# Altium PCB 0-PCB2_1.PcbDoc
Units mil, origin at the board's own origin, x right, y up, seen from the top; angles counter-clockwise.
Board outline 1640.12 x 1640.12 mil, 2 copper layers (Top Layer, Bottom Layer); 32 components, 33 nets, 260 pads, 84 vias.
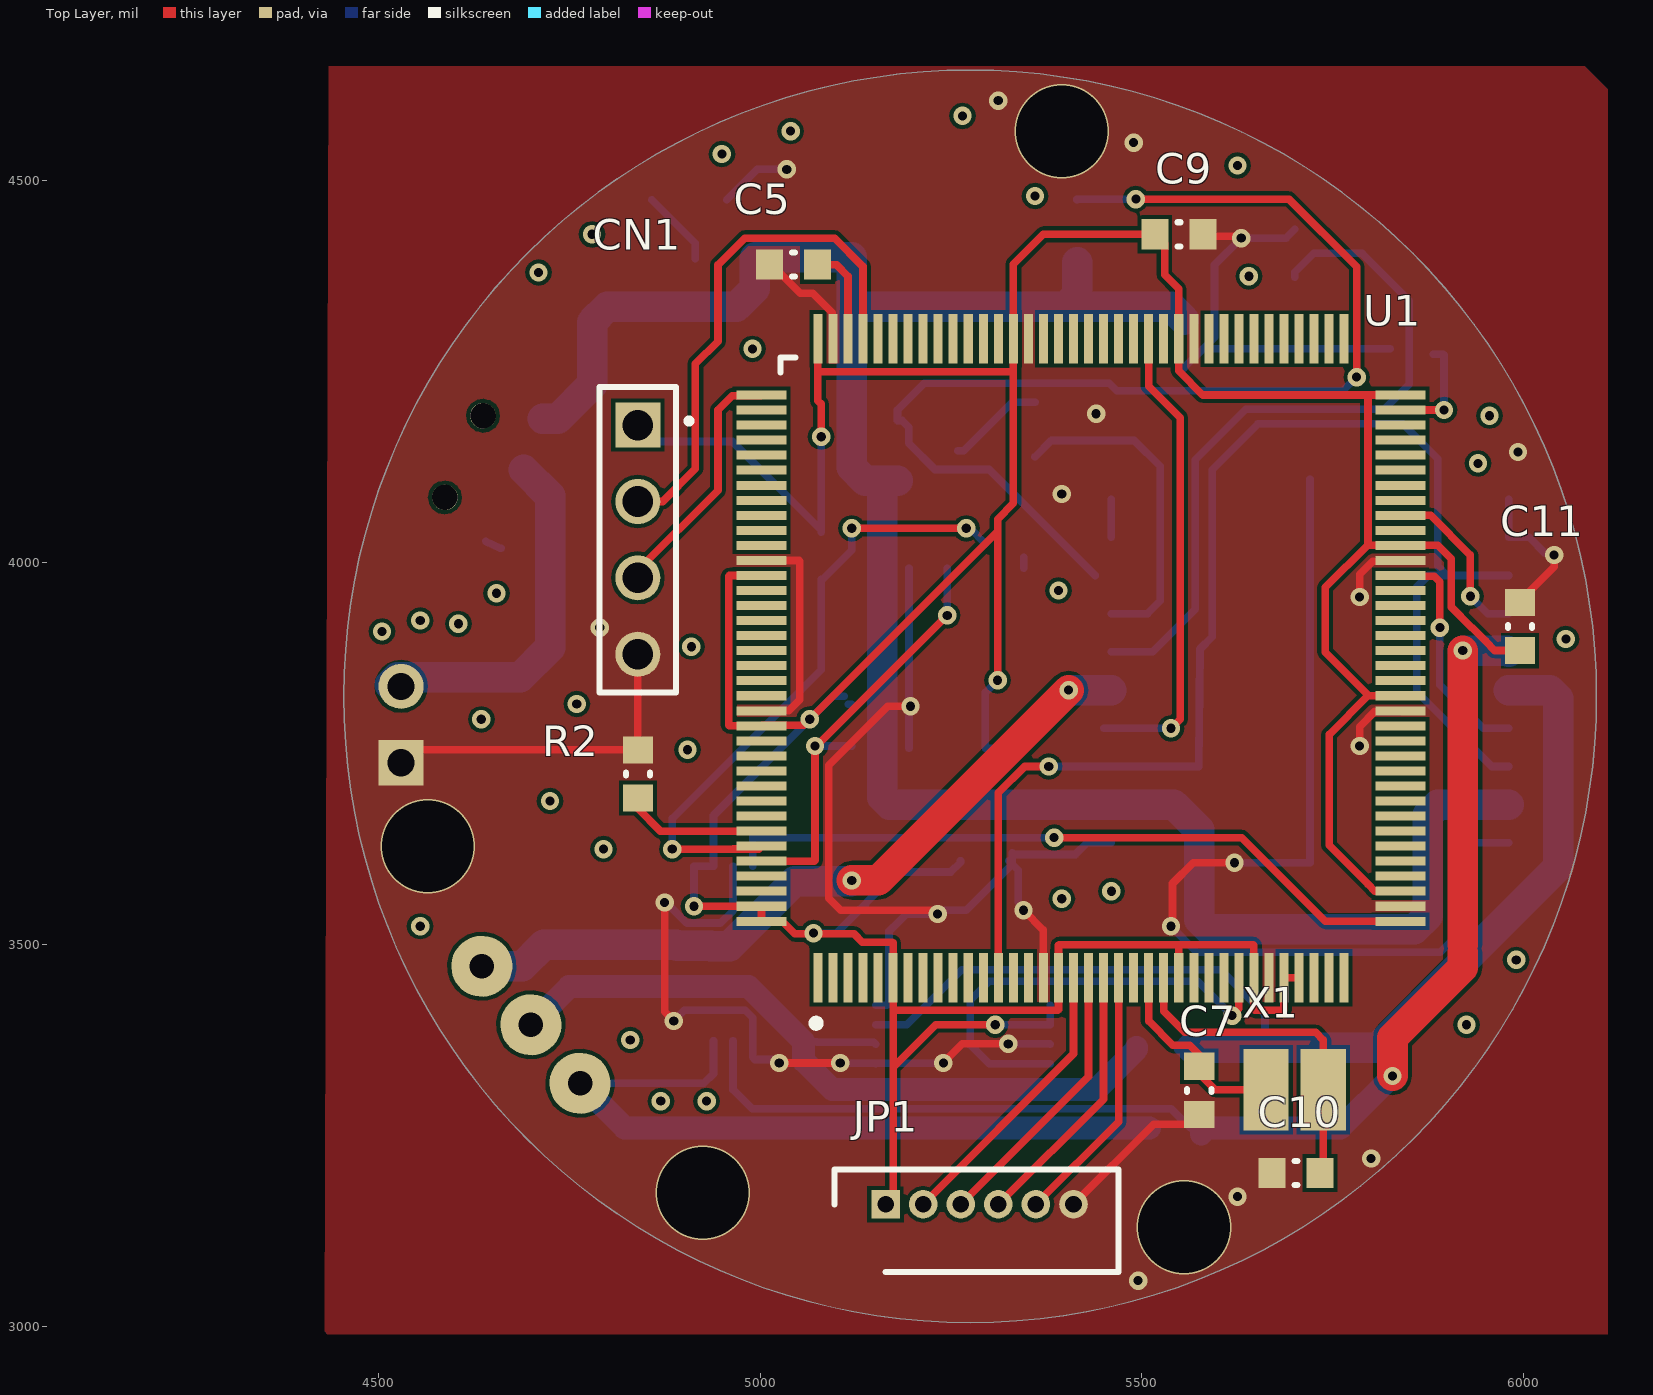
[diagram p0: Top Layer view]
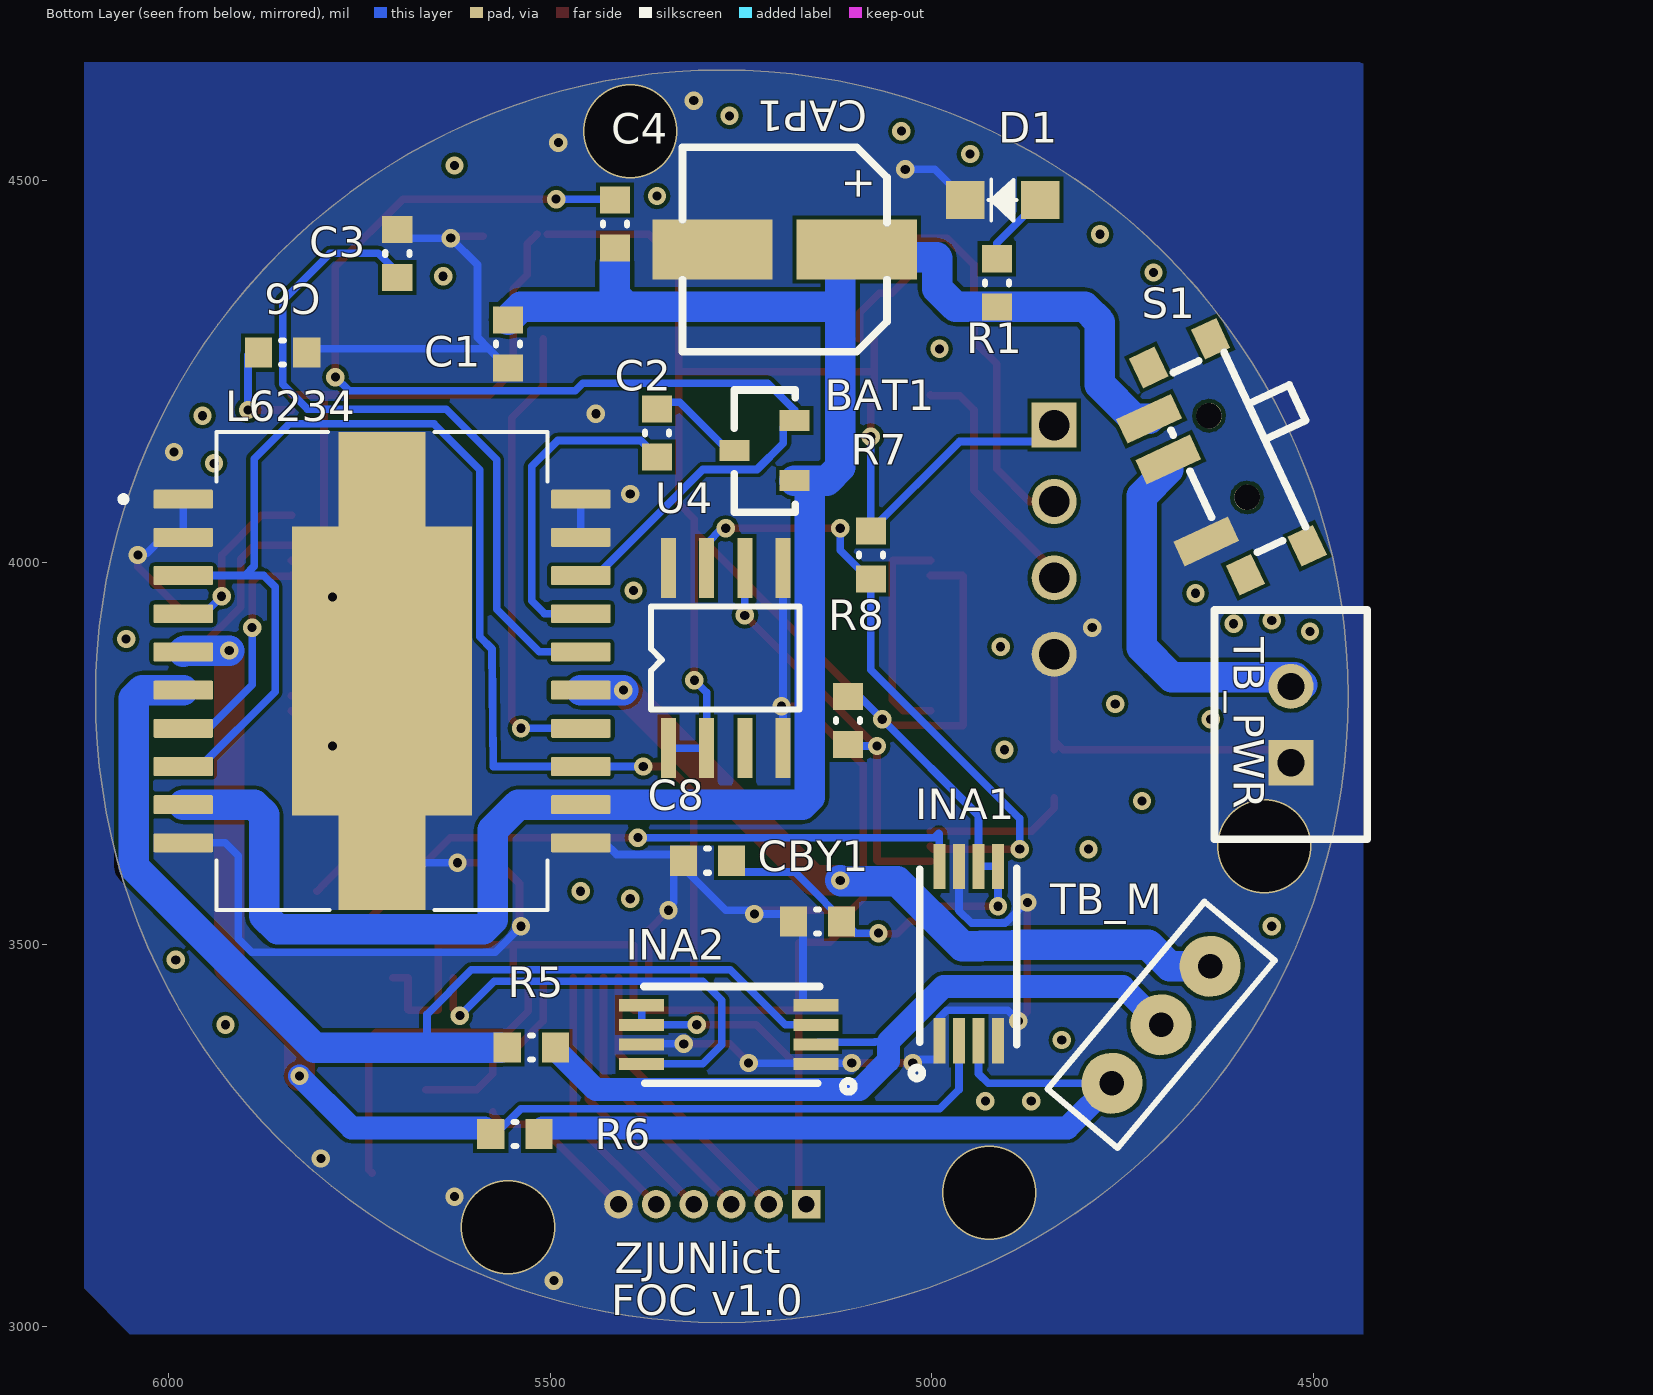
[diagram p1: Bottom Layer view, seen from below]

## Layer stack, top to bottom
Top Solder: solder mask 0.4, Solder Resist, Dk 3.5
Top Layer: signal copper 1.4
Dielectric 1: dielectric 12.6, FR-4, Dk 4.8
Bottom Layer: signal copper 1.4
Bottom Solder: solder mask 0.4, Solder Resist, Dk 3.5

## Board outline
4454.94,3825 ccw(c5275,3825) 5275,3004.94 ccw(c5275,3825) 6095.06,3825 ccw(c5275,3825) 5275,4645.06 ccw(c5275,3825)

## Design rules (kind name [scope] priority, off if disabled: settings)
Clearance [All] p1: gap=5 ignorepadtopadclearanceinfootprint=FALSE
HoleSize [All] p1: absolutevalues=TRUE maxlimit=150 minlimit=1 maxpercent=80.000 minpercent=20.000
HoleToHoleClearance [All] p1: gap=5 allowstackedmicrovias=TRUE
MinimumSolderMaskSliver [All] p1: minsoldermaskwidth=0
PlaneConnect [All] p1: planeconnectstyle=Direct reliefexpansion=20 reliefentries=4 reliefconductorwidth=10 reliefairgap=10
PolygonConnect [All] p1: connectstyle=Direct reliefconductorwidth=10 reliefentries=4 polygonreliefangle="90 Angle" airgapwidth=10
RoutingVias [All] p1: holewidth=12 width=24 viastyle="Through Hole" minholewidth=12 minwidth=24 maxholewidth=12 maxwidth=24
SilkToSilkClearance [All] p1: silktosilkclearance=5
SilkToSolderMaskClearance [IsPad] p1: minsilkscreentomaskgap=0 clearancetoexposedcopper=TRUE
SolderMaskExpansion [All] p1: expansion=3 useseparateexpansions=TRUE expansionbottom=3
Width [All] p1: maxlimit=40 minlimit=6 preferedwidth=10 minimp=50.000000 maximp=50.000000 favimp=50.000000
24 further rules are at their usual default settings.

## Components (designator, comment, footprint, x,y, rotation, side; value= is the part's Value field where it differs from the comment)
BAT1 "BAT54S" BAT54s 5258.74,4186.13 r180 bottom
C1 "100nF" 0603C 5555,4286.5 r270 bottom
C2 "10nF" 0603C 5360,4170 r270 bottom
C3 "1μF" 0603C 5700,4405 r90 bottom
C4 "220nF" 0603C 5415,4443.5 r90 bottom
C5 "1μF" 0603C 5043.72,4390.2 r180 top
C6 "1μF" 0603C 5850,4275 r180 bottom
C7 "4.3pF" 0603C 5575,3309.22 r270 top
C8 "100nF" 0603C 5294,3609.8 r0 bottom
C9 "1μF" 0603C 5548.5,4430 r0 top
C10 "4.3pF" 0603C 5701.63,3201.01 r180 top
C11 "100nF" 0603C 5995,3916.34 r90 top
CAP1 "EEH-ZA1E101XP" EEH-ZA1E101XP 5326.62,4276.14 r180 bottom
CBY1 "0.1μF" 0603C 5150,3530 r0 bottom
CN1 "SWD" HDR_1x4_2R54_V_M 4840,4180.12 r270 top
D1 "LED" D0805+ 4858.27,4475 r0 bottom
INA1 "INA240A1" INA240 4951.79,3488.32 r180 bottom
INA2 "INA240A2" INA240 5265.83,3382.2 r90 bottom
JP1 "SPI1" SHDR6 5164.3,3160 r0 top
L6234 "L6234PD013TR" SOIC127P1420X360-21N 5720,3858.17 r180 bottom
R1 "2K" 0603R 4915,4366.5 r90 bottom
R2 "10K" 0603R 4840,3723.5 r90 top
R5 "10mOhm" 0603R 5524.5,3365 r180 bottom
R6 "10mOhm" 0603R 5546.16,3252.2 r180 bottom value=1K
R7 "4.7KOhm" 0603R 5080,4010 r90 bottom
R8 "4.7kOhm" 0603R 5110,3793.5 r90 bottom
S1 "" SW-SMD_G-SWITCH_MK-12C02-G015 4610,4140 r65 bottom
TB_M "TB002-500-03BE" 10.7MHZ 4635.72,3471.6 r310 bottom
TB_PWR "TB002-500-02BE" 1*2_2.5mm 4530,3738.09 r180 bottom
U1 "MCU_LQFP144" LQFP144_0R5_SKT 5420.2,3875 r0 top
U4 "AS5600" "SOIC 8" 5270,3875 r90 bottom
X1 "NX3225GD-8M" OSC_2SM_3R2x2R5 5700.01,3310 r180 top

## Footprints (in the part's own frame and the unit in brackets; to place one, negate y for a bottom-side part, rotate by r counter-clockwise, add the part's x,y. Pads: shape width x height; smd on the part's side, far side on the other; paste and mask are expansions set on the pad)
1*2_2.5mm [mm]
  rect 1.5x1.5 hole 0.9: 1(0,0)
  round 1.5 hole 0.9: 2(0,2.54)
  silkscreen extent -2.54,-2.54 2.54,5.08
10.7MHZ [mil]
  round 80 hole 32: 1(0,0) 2(200,0) 3(100,0)
  silkscreen extent -60,-60 260,60
0603C [mm] "Chip Capacitor, Body 1.6x0.8mm, Height 1.0mm, IPC Medium Density"
  rect 0.9x1 smd: 1(-0.8,0) 2(0.8,0)
  silkscreen extent -0.05,-0.4 0.05,0.4, body extent -0.87,-0.48 0.88,0.47, height 1
0603R [mm] "Chip Resistor, Body 1.6x0.8mm, IPC Medium Density"
  rect 0.9x1 smd: 1(-0.8,0) 2(0.8,0)
  silkscreen extent -0.05,-0.4 0.05,0.4, body extent -0.85,-0.47 0.85,0.47, height 0.6
BAT54s [mm]
  rect 1x0.7 smd: 1(2,-2) 2(2,0) 3(0,-1)
  silkscreen extent 0,-3.05 2.03,1.02, body extent -0.46,-2.48 2.46,0.44, height 1
D0805+ [mil]
  rect 50x50 smd: A(0,0) K(98,0)
  silkscreen extent 31,-27 68,27
EEH-ZA1E101XP [mm]
  rect 4x2 smd: 1(1,3.4) 2(5.8,3.4)
  silkscreen extent 0,0 6.8,6.8, body extent -0.3,0.2 7,6.8, height 7.7
HDR_1x4_2R54_V_M [mm] "Male Header, Pitch 2.54mm, 4x1 Position, Mated Height 6mm, Tail Length 3mm"
  rect 1.5x1.5 hole 1.02: 1(0,0)
  round 1.5 hole 1.02: 2(2.54,0) 3(5.08,0) 4(7.62,0)
  silkscreen extent -1.27,-1.27 8.89,1.76, body extent -1.27,-1.27 8.89,1.27, height 9
INA240 [mm]
  rect 0.4x1.5 smd mask+0.05: 1(-0.975,-2.9) 2(-0.325,-2.9) 3(0.325,-2.9) 4(0.975,-2.9) 5(0.975,2.9) 6(0.325,2.9) 7(-0.325,2.9) 8(-0.975,2.9)
  silkscreen extent -1.91,-4.16 1.6,2.83, body extent -1.5,-3.3 1.5,3.3, height 1.2
LQFP144_0R5_SKT [mm] "32-bit MCU ARM-based Cortex-M3 20 X 20mm, 0.5mm Pitch, 1.6mm Max thickness"
  rect 0.3x1.65 smd: 1(-8.75,-10.625) 2(-8.25,-10.625) 3(-7.75,-10.625) 4(-7.25,-10.625) 5(-6.75,-10.625) 6(-6.25,-10.625) 7(-5.75,-10.625) 8(-5.25,-10.625) 9(-4.75,-10.625) 10(-4.25,-10.625) 11(-3.75,-10.625) 12(-3.25,-10.625) 13(-2.75,-10.625) 14(-2.25,-10.625) 15(-1.75,-10.625) 16(-1.25,-10.625) 17(-0.75,-10.625) 18(-0.25,-10.625) 19(0.25,-10.625) 20(0.75,-10.625) 21(1.25,-10.625) 22(1.75,-10.625) 23(2.25,-10.625) 24(2.75,-10.625) 25(3.25,-10.625) 26(3.75,-10.625) 27(4.25,-10.625) 28(4.75,-10.625) 29(5.25,-10.625) 30(5.75,-10.625) 31(6.25,-10.625) 32(6.75,-10.625) 33(7.25,-10.625) 34(7.75,-10.625) 35(8.25,-10.625) 36(8.75,-10.625) 73(8.75,10.625) 74(8.25,10.625) 75(7.75,10.625) 76(7.25,10.625) 77(6.75,10.625) 78(6.25,10.625) 79(5.75,10.625) 80(5.25,10.625) 81(4.75,10.625) 82(4.25,10.625) 83(3.75,10.625) 84(3.25,10.625) 85(2.75,10.625) 86(2.25,10.625) 87(1.75,10.625) 88(1.25,10.625) 89(0.75,10.625) 90(0.25,10.625) 91(-0.25,10.625) 92(-0.75,10.625) 93(-1.25,10.625) 94(-1.75,10.625) 95(-2.25,10.625) 96(-2.75,10.625) 97(-3.25,10.625) 98(-3.75,10.625) 99(-4.25,10.625) 100(-4.75,10.625) 101(-5.25,10.625) 102(-5.75,10.625) 103(-6.25,10.625) 104(-6.75,10.625) 105(-7.25,10.625) 106(-7.75,10.625) 107(-8.25,10.625) 108(-8.75,10.625)
  rect 1.65x0.3 smd: 37(10.625,-8.75) 38(10.625,-8.25) 39(10.625,-7.75) 40(10.625,-7.25) 41(10.625,-6.75) 42(10.625,-6.25) 43(10.625,-5.75) 44(10.625,-5.25) 45(10.625,-4.75) 46(10.625,-4.25) 47(10.625,-3.75) 48(10.625,-3.25) 49(10.625,-2.75) 50(10.625,-2.25) 51(10.625,-1.75) 52(10.625,-1.25) 53(10.625,-0.75) 54(10.625,-0.25) 55(10.625,0.25) 56(10.625,0.75) 57(10.625,1.25) 58(10.625,1.75) 59(10.625,2.25) 60(10.625,2.75) 61(10.625,3.25) 62(10.625,3.75) 63(10.625,4.25) 64(10.625,4.75) 65(10.625,5.25) 66(10.625,5.75) 67(10.625,6.25) 68(10.625,6.75) 69(10.625,7.25) 70(10.625,7.75) 71(10.625,8.25) 72(10.625,8.75) 109(-10.625,8.75) 110(-10.625,8.25) 111(-10.625,7.75) 112(-10.625,7.25) 113(-10.625,6.75) 114(-10.625,6.25) 115(-10.625,5.75) 116(-10.625,5.25) 117(-10.625,4.75) 118(-10.625,4.25) 119(-10.625,3.75) 120(-10.625,3.25) 121(-10.625,2.75) 122(-10.625,2.25) 123(-10.625,1.75) 124(-10.625,1.25) 125(-10.625,0.75) 126(-10.625,0.25) 127(-10.625,-0.25) 128(-10.625,-0.75) 129(-10.625,-1.25) 130(-10.625,-1.75) 131(-10.625,-2.25) 132(-10.625,-2.75) 133(-10.625,-3.25) 134(-10.625,-3.75) 135(-10.625,-4.25) 136(-10.625,-4.75) 137(-10.625,-5.25) 138(-10.625,-5.75) 139(-10.625,-6.25) 140(-10.625,-6.75) 141(-10.625,-7.25) 142(-10.625,-7.75) 143(-10.625,-8.25) 144(-10.625,-8.75)
  silkscreen extent -10,-12.27 -8.69,10
OSC_2SM_3R2x2R5 [mm] "Crystal 8M Hz 3.2x2.5mm SMD"
  rect 1.5x2.7 smd: 1(-0.95,0) 2(0.95,0)
  body extent -1.6,-1.25 1.6,1.25, height 1
SHDR6 [mm]
  rect 0.95x0.95 hole 0.55: 1(0,0)
  round 0.95 hole 0.55: 2(1.25,0) 3(2.5,0) 4(3.75,0) 5(5,0) 6(6.25,0)
  silkscreen extent -1.7,-2.25 7.75,1.15
SOIC127P1420X360-21N [mm]
  rrect16% 1.99x0.63 smd: 1(-6.61,5.715) 2(-6.61,4.445) 3(-6.61,3.175) 4(-6.61,1.905) 5(-6.61,0.635) 6(-6.61,-0.635) 7(-6.61,-1.905) 8(-6.61,-3.175) 9(-6.61,-4.445) 10(-6.61,-5.715) 11(6.61,-5.715) 12(6.61,-4.445) 13(6.61,-3.175) 14(6.61,-1.905) 15(6.61,-0.635) 16(6.61,0.635) 17(6.61,1.905) 18(6.61,3.175) 19(6.61,4.445) 20(6.61,5.715)
  rect 6x9.6 smd paste-6: 21(0,0)
  rect 2.9x3.15 smd paste-3: 22(0,6.375) 23(0,-6.375)
  silkscreen extent -8.7,-7.95 5.5,7.95
"SOIC 8" [mm]
  rect 2x0.5 smd: 1(-2.993,1.905) 2(-2.993,0.635) 3(-2.993,-0.635) 4(-2.993,-1.905) 5(2.993,-1.905) 6(2.993,-0.635) 7(2.993,0.635) 8(2.993,1.905)
  silkscreen extent -1.71,-2.45 1.72,2.48
SW-SMD_G-SWITCH_MK-12C02-G015 [mm]
  rect 0.9x2 smd: 1(-2.25,1.912) 2(0.75,1.912) 3(2.25,1.912)
  rect 1.1x0.93 smd: 4(3.8,1.2) 5(3.8,-1.07) 6(-3.8,-1.07) 7(-3.8,1.2)
  round 0.85 hole 0.85 unplated: ""(-1.5,0.065) ""(1.5,0.065)
  silkscreen extent -3.3,-2.78 3.3,1.42

## Part data
BAT1: Supplier Part Number 1=512-BAT54S, Supplier 1=Mouser
C1 C2 C3 C4 C5 C6 C11 CBY1: library part CAP_1
C7 C8 C9 C10: library part CAP, "Capacitor"
CAP1: Supplier Part Number 1=667-EEH-ZA1E101XP, Supplier 1=Mouser
CN1: library part "Header 4", "Header, 4-Pin, Single row", Publisher="Altium Limited", Revision="17-Jul-2002: Re-released for DXP Platform."
INA1 INA2: library part INA240, Supplier Part Number 1=595-INA240A2PWR, Supplier 1=Mouser
JP1: library part "HEADER 6"
L6234: "Motor Driver BiCDMOS Parallel PowerSO-20", Package="SO-20 STMicroelectronics", Digi-Key_Part_Number=497-5352-1-ND, Digi-Key_Purchase_URL=https://www.digikey.com/product-detail/en/stmicroelectronics/L6234PD013TR/497-5352-1-ND/1154483?utm_source=snapeda&utm_medium=aggregator&utm_campaign=symbol, MF=STMicroelectronics, MP=L6234PD013TR, SnapEDA_Link=https://www.snapeda.com/parts/L6234PD013TR/STMicroelectronics/view-part/75337/?ref=snap
R1 R2: library part RES1
R5 R7 R8: library part RES2
R6: library part Res1, "Resistor", Ordered by=Subcon, Published=8-Jun-2000, Publisher="Altium Limited", Revision="July-2002: Re-released for DXP Platform."
S1: library part MK-12C02-G015
TB_M: Supplier Part Number 1=490-TB002-500-03BE, Supplier 1=Mouser
TB_PWR: Supplier Part Number 1=490-TB002-500-02BE, Supplier 1=Mouser
X1: library part XTAL, "Crystal Oscillator", LatestRevisionDate=17-Jul-2002, LatestRevisionNote="Re-released for DXP Platform.", PackageReference=R38, Published=8-Jun-2000, Publisher="Altium Limited"

## Via types
v1: diameter 24, hole 12, Top Layer to Bottom Layer, 80 vias
v2: diameter 124, hole 120, Top Layer to Bottom Layer, 4 vias

## Nets (pads, with @x,y where several pads share a name; then routed paths per layer and width w, separated by ;. In a path a pad name is that pad's centre, name@x,y a point inside that pad or via, vN(x,y) a via of type N, cw(c..) or ccw(c..) an arc to the next point about the centre after c; other vN are vias at no path point)
+3.3: C8.1 C9.1 C11.1 CBY1.1 CN1.1 INA1.5 INA1.6 INA2.5 INA2.6 JP1.1 R7.2 R8.2 U1.6 U1.17 U1.25 U1.30 U1.32 U1.33 U1.39 U1.52 U1.62 U1.72 U1.84 U1.95 U1.108 U1.121 U1.131 U1.143 U1.144 U4.1 U4.2 | length 6250.8
  Top Layer w10: CN1.1@4841.41,4188.07 CN1.1@4844.68,4191.34 ; v1(4913.4,3550.2) U1.143 U1.144 5029,3530.51 5045.51,3514 5123,3514 5134,3503 5173.14,3503 5174.14,3502 U1.6 5174.14,3415 ; U1.121 4960,3983.27 4959,3982.27 4959,3787.42 4960,3786.42 U1.131 5002.8,3787.32 5057.32,3787.32 v1(5065,3795) 5311,4041 ; U1.108 5075.71,4251 ; v1(5080,4165) 5080,4207.75 5075.71,4212.04 5075.71,4251 ; JP1.1 5174.14,3169.84 5174.14,3339.14 ; v1(5308,3395) 5230,3395 5174.14,3339.14 ; v1(5311,3846) 5311,4041 ; C9.1@5503.5,4430 5370.99,4430 5331.62,4390.63 U1.95 5331.62,4251 ; C9.1 5529.72,4417.28 5529.72,4376.81 5548.16,4358.38 U1.84 5548.16,4251.16 5579.82,4219.49 5797,4219.49 ; U1.25 5548.16,3499 ; U1.33 U1.32 5685.95,3415 5684.95,3414 5647.58,3414 5646.58,3415 U1.30 5646.58,3499 5645.58,3500 5549.16,3500 5548.16,3499 ; 5797,3825.79 U1.52 ; 5797,4022.64 U1.62 5887.36,4022.64 5905,4005 5905,3942 5932,3915 5932.43,3915 5950,3897.43 5950,3897 5962,3885 C11.1@5980,3885 ; 5805.06,3569.94 5796,3579 5745,3630 5745,3775 5796.39,3826.39 5740,3882.79 5740,3967.64 5796,4023.64 5796,4218.49 5797,4219.49 ; U1.72 5797,4219.49 ; 5075.71,4251 5076.71,4250 5330.62,4250 5331.62,4251 ; 5174.14,3339.14 5174.14,3415 ; 5174.14,3415 5175.14,3414 5389.68,3414 5390.68,3415 U1.17 5390.68,3499 5391.68,3500 5547.16,3500 5548.16,3499 ; 5311,4041 5311,4057.02 5331.62,4077.64 5331.62,4251
  Bottom Layer w10: CN1.1@4839.68,4181.22 4840.39,4180.51 4854.2,4166.69 4862.24,4158.66 4963.84,4158.66 R7.2@5080,4042.5 ; v1(4913.4,3550.2) INA1.5 INA1.6 4938.99,3668.99 v1(5065,3795) 5095,3825 R8.2 ; v1(5070,3515) 5099.5,3515 5179.62,3595.12 5249.78,3595.12 5262.5,3607.84 C8.1 ; R7.2@5080,4040 R7.2 R7.2@5080,4042.5 ; v1(5080,4165) R7.2@5080,4042.5 ; R8.2@5115.44,3814.56 R8.2@5120,3814.56 ; v1(5308,3395) INA2.6 INA2.5 ; v1(5311,3846) 5295,3830 U4.2 U4.1
GND: C1.2 C3.2 C5.2 C6.2 C7.2 C8.2 C9.2 C10.2 C11.2 CAP1.1 CBY1.2 CN1.4 D1.K INA1.1 INA1.4 INA1.7 INA2.1 INA2.4 INA2.7 JP1.6 L6234.1 L6234.2 L6234.10 L6234.11 L6234.19 L6234.20 L6234.21 L6234.22 L6234.23 R2.2 S1.1 TB_PWR.1 U1.16 U1.31 U1.38 U1.51 U1.61 U1.83 U1.94 U1.107 U1.120 U1.130 U4.4 U4.5 U4.8 | length 5796.9
  Top Layer w10: TB_PWR.1 4546.91,3755 4828.27,3755 R2.2@4840,3766.73 ; R2.2 R2.2@4840,3766.73 ; CN1.4 R2.2@4840,3766.73 ; v1(4875,3555) 4875,3412 v1(4887,3400) ; U1.130 5037.5,3806.1 5052,3820.6 5052,4001.95 5051,4002.95 U1.120 ; C5.2@5017.01,4390 5017.01,4388.03 5052.42,4352.62 5068.93,4352.62 5094.49,4327.06 5094.49,4294.21 U1.107 ; v1(5025,3345) v1(5105,3345) v1@5105,3346.21 ; v1(5197,3812) 5167,3812 5090,3735 5090,3560.5 5105.5,3545 v1@5231,3545 ; v1(5240,3345) 5265,3370 v1(5325,3370) ; v1(5345,3545) 5370.99,3519.01 U1.16 ; JP1.6 5515.37,3265.01 5562.28,3265.01 C7.2 C7.2@5575,3281.15 ; v1(5538,3524) 5540,3526 5540,3580 5567.19,3607.19 v1(5621.19,3607.19) ; C9.2@5587.5,4427.5 5627.5,4427.5 v1(5630,4425) ; v1(5785,3760) 5785,3785.44 5804.76,3805.2 5837.6,3805.2 U1.51 ; v1(5785,3955) 5785,3985 5802.05,4002.05 5837.6,4002.05 U1.61 ; C11.2@5980,3935 6039.64,3994.64 v1(6039.64,4010)
  Bottom Layer w10: S1.1 4660.4,4018.76 S1.1@4661,4018.76 ; v1(4875,3555) 4877.49,3555 4904.29,3528.2 4947.8,3528.2 4948,3528 4964.58,3544.58 INA1.7 ; v1(4887,3400) 4901,3414 4980.43,3414 4990.18,3404.25 INA1.1 4990.18,3352.49 4993.05,3349.62 5016.59,3349.62 5021.21,3345 v1(5025,3345) ; D1.K 4996.27,4515 v1(5035,4515) ; v1(5105,3345) 5105.59,3344.41 5151.06,3344.41 INA2.1 5152.24,3344.41 5239.41,3344.41 v1(5240,3345) ; INA2.4 5165.91,3420.59 5168.78,3423.46 5168.78,3517.28 CBY1.2 5191.5,3540 v1(5232.5,3540) ; U4.4 v1@5195,3810 ; U4.5 v1@5195,3810 ; v1(5197,3812) v1@5195,3810 ; v1@5231,3545 5270,3545 5330,3605 C8.2@5330,3605.3 ; v1(5325,3370) 5379.41,3370 INA2.7 ; C8.2 C8.2@5330,3605.3 ; v1(5345,3545) 5345,3548.79 5338.21,3555.58 5338.21,3597.09 C8.2@5330,3605.3 ; U4.8 U4.8@5345,4007 ; L6234.11 5428.17,3633.17 5413,3618 5332,3618 5330,3620 C8.2@5330,3605.3 ; L6234.19 L6234.20 ; v1(5538,3524) 5572,3490 5890.57,3490 5908,3507.43 5908,3616.17 5925,3633.17 L6234.10 ; C1.2 5580,4280 ; v1(5621.19,3607.19) L6234.23 L6234.21 L6234.22 ; C3.2 5688.5,4425 v1(5630,4425) 5595,4390 5595,4295 5580,4280 ; C6.2@5825,4280 5580,4280 ; L6234.1 L6234.2 6007.01,4033.17 6027.5,4012.68 6042.32,4012.68 v1(6039.64,4010)
  other v1: 5495,3060 5625,3170 5800,3220 4790,3915 5395,4090 5992.33,4145 5440,4195 5489.1,4550 5311.93,4605
  other v2: 5555,3130 4925,3175 4565,3628.94 5395,4565
NetBAT1_2: BAT1.2 C4.2 L6234.18 | length 1929.3
  Top Layer w10: v1(5492,4476) 5692.5,4476 5781,4387.5 v1(5781,4243)
  Bottom Layer w10: C4.2 C4.2@5415,4476 ; L6234.18@5438.77,3983.23 5300,4122 5229,4122 5194.69,4156.32 5194.69,4177.35 5185.91,4186.13 BAT1.2 5180,4200 5215,4235 5457,4235 5467,4225 5763,4225 v1(5781,4243) ; C4.2@5415,4476 v1(5492,4476) ; C4.2@5415,4476 v1(5492,4476) ; C4.2@5415,4476 v1(5492,4476) ; C4.2@5415,4476 v1(5492,4476) ; C4.2@5415,4476 v1(5492,4476) ; C4.2@5415,4476 v1(5492,4476)
NetBAT1_3: BAT1.3 C2.1 | length 157.5
  Bottom Layer w10: BAT1.3 5266.76,4146.76 5330,4210 ; 5330,4210 5360,4210 5330,4210
NetC2_2: C2.2 L6234.17 | length 434.2
  Bottom Layer w10: C2.2 5381.5,4160 5490,4160 5524,4126 5524,3950 5507.17,3933.17 L6234.17
NetC3_1: C3.1 L6234.16 | length 952.1
  Bottom Layer w10: L6234.16 5514,3883.17 5570,3939.17 5570,4135 5636,4201 5817.5,4201 5850,4233.5 5850,4343 5788,4405 5725,4405 5700,4380 C3.1
NetC5_1: C5.1 U1.106 | length 123
  Top Layer w10: C5.1@5080,4390 5100.08,4390 5115.08,4375 U1.106
NetC6_1: C6.1 U1.71 | length 156.5
  Top Layer w10: U1.71 5838.61,4199.9 5895.41,4199.9 v1(5895.51,4200)
  Bottom Layer w10: v1(5895.51,4200) 5895.51,4272 C6.1@5894.51,4273 ; C6.1@5894.51,4273 5881.5,4273 C6.1@5894.51,4273
NetC7_1: C7.1 U1.23 X1.2 | length 262.2
  Top Layer w10: U1.23 5508.79,3400 5540.57,3368.21 5562.5,3368.21 5575,3355.71 5575,3331.15 5596.15,3310 X1.2
NetC10_1: C10.1 U1.24 X1.1 | length 444.4
  Top Layer w10: U1.24 5528.47,3412.5 5555.97,3385 5727.41,3385 5737.41,3375 X1.1 5737.41,3205.3 C10.1
NetCN1_2: CN1.2 U1.105 | length 686.5
  Top Layer w10: CN1.2 4872.46,4080.12 4915.31,4122.97 4915.31,4260.31 4945,4290 4945,4390 4980,4425 5097.5,4425 5134.77,4387.73 U1.105
NetCN1_3: CN1.3 U1.109 | length 328.3
  Top Layer w10: CN1.3 4840,3990 4945,4095 4945,4200 4963.58,4218.58 5000.99,4218.58 U1.109
NetD1_A: D1.A R1.2 | length 100.5
  Bottom Layer w10: D1.A 4915,4418.27 R1.2
NetINA1_2: INA1.2 L6234.5 R6.1 | length 1614.5
  Top Layer w40: v1(5828,3328) 5828,3378 5920,3470 5920,3490 ; 5920,3500 v1(5920,3885)
  Bottom Layer w10: INA1.2 4964.58,3310 4989.58,3285 5538,3285 R6.1@5563,3260 ; R6.1@5577.66,3253.13 5578.02,3252.96 R6.1@5579.66,3252.2
  Bottom Layer w30: R6.1 5577.66,3253.13 5577.66,3254.16 5580.37,3256.88 5582.34,3256.88 5585.46,3260 5760,3260 v1(5828,3328)
  Bottom Layer w40: v1(5920,3885) 5978.41,3885 L6234.5
NetINA1_3: INA1.3 R6.2 TB_M.2 | length 993
  Bottom Layer w10: TB_M.2 4926.39,3318.4 4938.99,3331 INA1.3
  Bottom Layer w30: TB_M.2 4822.67,3260 R6.2@5510,3260
NetINA1_8: INA1.8 U1.37 | length 939.1
  Top Layer w10: v1(5385,3640) 5630.51,3640 5740,3530.51 U1.37
  Bottom Layer w10: INA1.8 4990.18,3645 4991.18,3646 4997.18,3640 v1(5385,3640)
NetINA2_2: INA2.2 R5.2 TB_M.3 | length 1004.5
  Bottom Layer w10: 5057,3373.01 5074.5,3373.01 5075.22,3372.28 5148.78,3372.28 INA2.2
  Bottom Layer w30: TB_M.3 4750,3445 4985.01,3445 5057,3373.01 5057,3347.75 5094.75,3310 5439.97,3310 5493,3363.03 R5.2
NetINA2_3: INA2.3 L6234.6 R5.1 | length 1707.5
  Bottom Layer w10: INA2.3 5192,3395 5264,3467 5603,3467 5661,3409 5661,3362.5 5648.5,3350 5596.5,3350 R5.1@5566,3350 ; R5.1@5551,3365 R5.1@5558,3358 ; R5.1@5551,3365 R5.1@5558,3358 ; R5.1@5551,3365 R5.1@5558,3358 ; R5.1@5551,3365 R5.1@5558,3358 ; R5.1@5551,3365 R5.1@5558,3358 ; R5.1@5551,3365 5553.5,3362.5 R5.1@5558,3358 ; R5.1@5558,3358 R5.1@5566,3350 ; R5.1@5558,3358 R5.1@5566,3350 ; R5.1@5558,3358 R5.1@5566,3350 ; R5.1@5558,3358 R5.1@5566,3350 ; R5.1@5558,3358 R5.1@5566,3350
  Bottom Layer w20: R5.1@5551,3365 R5.1@5565,3365
  Bottom Layer w40: R5.1@5565,3365 5596.5,3365 5661,3365 5808,3365 6045,3602 6045,3822.17 6034,3833.17 L6234.6
NetINA2_8: INA2.8 U1.29 | length 598.9
  Top Layer w10: v1(5618,3407) 5626.9,3415.9 U1.29
  Bottom Layer w10: INA2.8 5300,3343.82 5275,3368.82 5275,3427 5300,3452 5573,3452 v1(5618,3407)
NetJP1_2: JP1.2 U1.18 | length 378.2
  Top Layer w10: JP1.2 5410.36,3356.85 U1.18
NetJP1_3: JP1.3 U1.19 | length 366
  Top Layer w10: JP1.3 5430.05,3327.32 U1.19
NetJP1_4: JP1.4 U1.20 | length 353.8
  Top Layer w10: JP1.4 5449.73,3297.8 U1.20
NetJP1_5: JP1.5 U1.21 | length 341.5
  Top Layer w10: JP1.5 5469.42,3268.27 U1.21
NetL6234_3: L6234.3 L6234.8 L6234.13 U1.13 | length 1835.9
  Top Layer w10: U1.13 5311.93,3580.56 5311.93,3698.68 5346.43,3733.17 v1(5378,3733.17)
  Bottom Layer w10: v1(5378,3733.17) L6234.13 5574.25,3733.17 5575.98,3886.98 5591.89,3902.89 5591.89,4121.89 5652,4182 5841.5,4182 5887.5,4136 5887.5,3995.67 5900,3983.17 ; L6234.8 5957.83,3733.17 5860,3831 5860,3968.17 5875,3983.17 5900,3983.17 ; L6234.3 5900,3983.17
NetL6234_4: L6234.4 U1.64 | length 226.6
  Top Layer w10: U1.64 5877.99,4062.01 5930,4010 v1(5930,3956.17)
  Bottom Layer w10: v1(5930,3956.17) 5953,3933.17 L6234.4
NetL6234_7: L6234.7 U1.60 | length 303.7
  Top Layer w10: U1.60 5839.42,3982.36 5882.64,3982.36 5890,3975 v1(5890,3915)
  Bottom Layer w10: v1(5890,3915) 5890,3840 5946.83,3783.17 L6234.7
NetL6234_14: L6234.14 U1.86 | length 620.2
  Top Layer w10: U1.86 5508.79,4231.21 5550,4190 5550,3795.17 v1(5538,3783.17)
  Bottom Layer w10: L6234.14@5450,3783.17 L6234.14 v1(5538,3783.17)
NetL6234_15: L6234.15 TB_M.1 | length 975.5
  Top Layer w40: v1(5120,3584) 5154.83,3584 v1(5404,3833.17)
  Bottom Layer w40: TB_M.1 4688.6,3471.6 4717,3500 4890.06,3500 4891.87,3498.2 4935.38,3498.2 4935.57,3498 4960.43,3498 5045.43,3583 5053,3583 5119,3583 v1(5120,3584) ; v1(5404,3833.17) L6234.15
NetR2_1: R2.1 U1.138 | length 187.9
  Top Layer w10: R2.1 4840,3678.27 4869.65,3648.62 U1.138
NetR7_1: R7.1 U1.139 U4.7 | length 824.3
  Top Layer w10: v1(4885,3625) 4965.12,3625 4965.27,3625.16 4998.12,3625.16 U1.139 ; v1(5120,4045) 5241,4045 ; 5245,4045 5241,4045 ; v1(5270,4045) 5241,4045
  Bottom Layer w10: v1(4885,3625) 4885,3665 5080,3860 R7.1 5081.97,3978.5 5120,4016.54 v1(5120,4045) ; v1(5270,4045) 5275,4045 U4.7@5295,4025
NetR8_1: R8.1 U1.140 U4.6 | length 1837.6
  Top Layer w10: U1.140 5071,3609.25 5072,3610.25 v1(5072,3760) ; v1@5073,3759 v1(5245,3931) ; v1@5073,3759 v1(5245,3931) ; v1@5073,3759 v1(5245,3931) ; v1@5073,3759 v1(5245,3931) ; v1@5073,3759 v1(5245,3931) ; v1@5073,3759 v1(5245,3931)
  Bottom Layer w10: v1(5245,3931) U4.6 ; v1(5072,3760) 5120,3760 v1(5072,3760)
NetS1_2: S1.2 TB_PWR.2 | length 652.3
  Bottom Layer w40: S1.2@4690.69,4121.69 4725,4087.38 4725,3889 4686,3850 ; TB_PWR.2@4525,3850 4515,3840 TB_PWR.2@4525,3850 ; TB_PWR.2@4525,3850 4686,3850 ; TB_PWR.2@4525,3850 4686,3850
VCC1: BAT1.1 C1.1 C4.1 CAP1.2 L6234.9 L6234.12 R1.1 S1.3 | length 3473.1
  Bottom Layer w40: S1.3 4735.27,4188.47 4780,4233.2 4780,4315 4800,4335 R1.1 4969,4335 4993,4359 4993,4398.87 4994,4399.87 ; BAT1.1 5160,4107.39 ; 5415,4393.5 5415,4350 5400,4335 ; C1.1 5537.99,4335 5400,4335 ; L6234.9 5887.5,3683.17 5874,3669.67 5874,3537.5 5856.5,3520 5587.5,3520 5575,3532.5 5575,3650 5541.83,3683.17 L6234.12 5169.83,3683.17 5160,3693 ; 4994,4399.87 CAP1.2@5120,4399.87 ; 4994,4399.87 CAP1.2@5120,4399.87 ; 5120,4336 CAP1.2@5120,4399.87 ; 5120,4336 5120,4124.89 5137.5,4107.39 5160,4107.39 ; 5120,4336 5121,4335 5400,4335 ; 5160,3693 5160,4107.39 ; 5160,3693 5160,4107.39
pads on no net: S1. S1.4 S1.5 S1.6 S1.7 U1.1 U1.2 U1.3 U1.4 U1.5 U1.7 U1.8 U1.9 U1.10 U1.11 U1.12 U1.14 U1.15 U1.22 U1.26 U1.27 U1.28 U1.34 U1.35 U1.36 U1.40 U1.41 U1.42 U1.43 U1.44 U1.45 U1.46 U1.47 U1.48 U1.49 U1.50 U1.53 U1.54 U1.55 U1.56 U1.57 U1.58 U1.59 U1.63 U1.65 U1.66 U1.67 U1.68 U1.69 U1.70 U1.73 U1.74 U1.75 U1.76 U1.77 U1.78 U1.79 U1.80 U1.81 U1.82 U1.85 U1.87 U1.88 U1.89 U1.90 U1.91 U1.92 U1.93 U1.96 U1.97 U1.98 U1.99 U1.100 U1.101 U1.102 U1.103 U1.104 U1.110 U1.111 U1.112 U1.113 U1.114 U1.115 U1.116 U1.117 U1.118 U1.119 U1.122 U1.123 U1.124 U1.125 U1.126 U1.127 U1.128 U1.129 U1.132 U1.133 U1.134 U1.135 U1.136 U1.137 U1.141 U1.142 U4.3
copper on no net:
  other v1: 4870,3295 4930,3295 4830,3375 5925,3395 5990,3480 4555,3524 5395,3560 5460,3569.88 4795,3625 4725,3687.99 4905,3755 4635,3795 4760,3815 4910,3890 6055,3900 4505,3910 4605,3920 4555,3924.21 4655,3960 5390.68,3963.58 5940,4130 5955,4192.44 4990,4280 5640,4375 4710,4380 4780,4430 5360,4480 5625,4520 4950,4535 5040,4565 5265,4585

## Polygon pours and split planes (outlines as drawn)
GND on Bottom Layer "Bottom Layer-GND" (solid, remove dead copper, pour order 0): 4435,4660 4440,4655 6110,4655 6110,3050 6050,2990 4435,2990
GND on Top Layer "Top Layer-GND" (solid, remove dead copper, pour order 2): 4435,4650 6080,4650 6110,4620 6110,2990 4429.91,2990

## Other copper
Top Layer:
  pour cut-out: 4115,4405

## Silkscreen, mask and mechanical layers (free items; w line width, h text height)
Bottom Overlay:
  text "ZJUNlict" at 5415,3070 h40
  text "FOC v1.0" at 5420,3015 h40
Mechanical 1:
  circle w10: c5275,3825 r825

## Text inside footprints (layer, text, board x,y; h text height)
CAP1: Bottom Overlay "+" at 5078.59,4472.99 h40 r270